# Altium PCB mb997.PcbDoc (part 3 of 4)
Units mil, origin at the board's own origin, x right, y up, seen from the top; angles counter-clockwise.
Board outline 2598.43 x 3818.9 mil, 2 copper layers (Top, Bottom), stack 62.402 mil thick; 189 components, 183 nets, 746 pads, 491 vias.
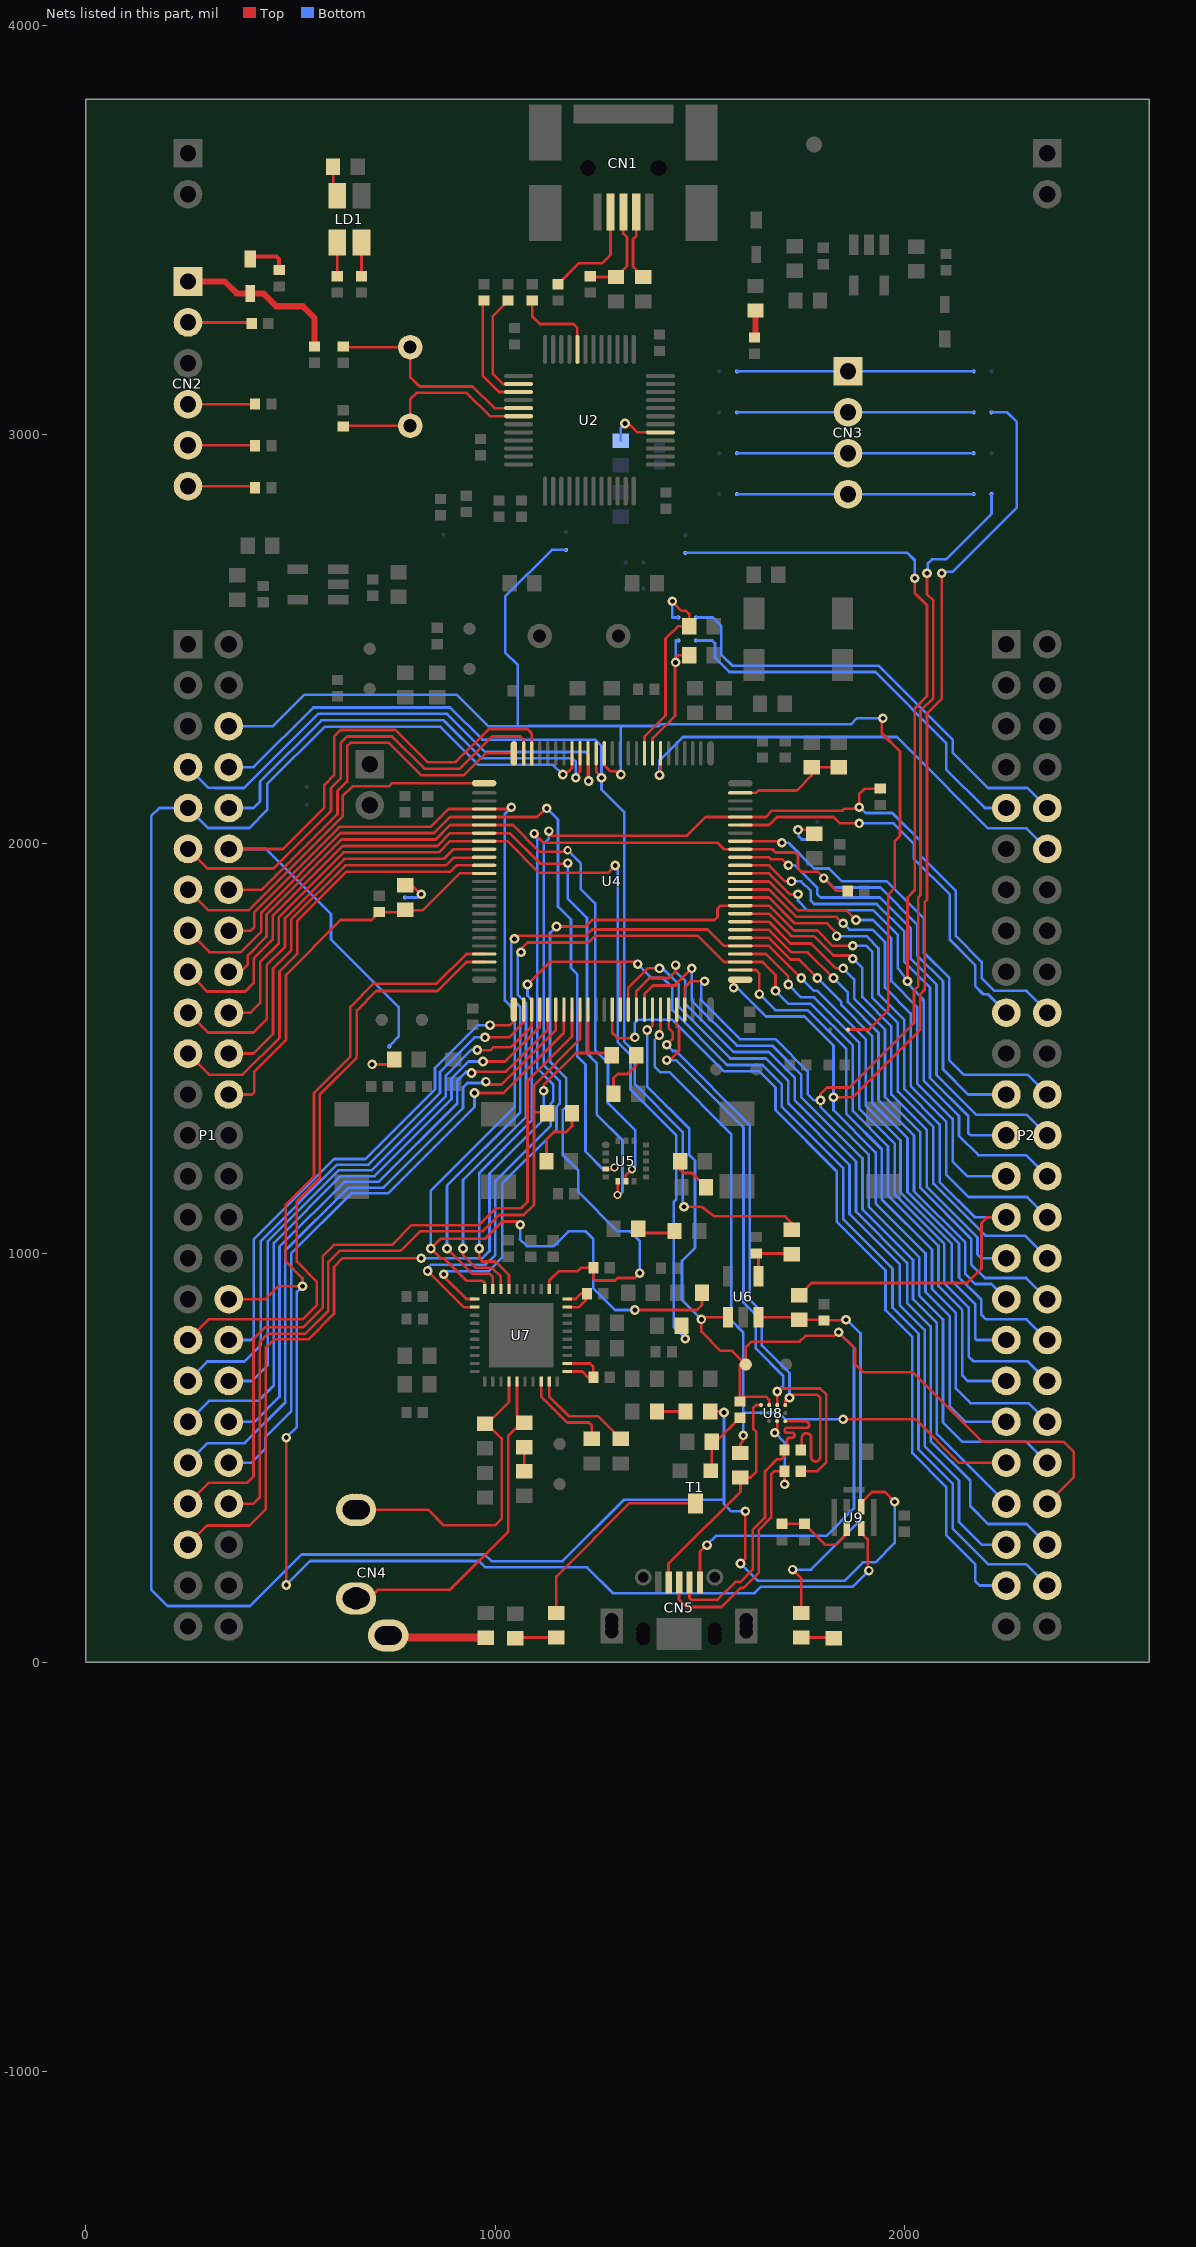
[diagram p3: the nets of this part, all layers, seen from the top]

## Via types
v1: diameter 23.62, hole 11.81, Top to Bottom, 484 vias
v2: diameter 19.68, hole 11.81, Top to Bottom, 7 vias

## Nets (pads, with @x,y where several pads share a name; then routed paths per layer and width w, separated by ;. In a path a pad name is that pad's centre, name@x,y a point inside that pad or via, vN(x,y) a via of type N, cw(c..) or ccw(c..) an arc to the next point about the centre after c; other vN are vias at no path point) (continued)
NetC54_2: C54.2 CN4.3 U7.14 | length 768.4
  Top w6.5: CN4.3@650.58,372.44 CN4.3@669.84,372.44 836.44,372.44 874.23,334.65 1000,334.65 1015.75,350.39 1015.75,547.24 982.91,580.08 C54.2@977.72,580.08 ; C54.2@975.2,582.6 C54.2@977.72,580.08 ; U7.14@1033.58,685.91 1033.58,635.94 C54.2@977.72,580.08
NetC55_1: C55.1 R62.2 | length 58.1
  Top w6.5: R62.2@1070.87,467.01 C55.1@1070.87,525.12
NetC55_2: C55.2 CN4.2 U7.15 | length 857.5
  Top w6.5: CN4.2@659.84,155.91 692.78,155.91 714.04,177.17 889.84,177.17 1031.5,318.83 1031.5,552.72 C55.2@1063.19,584.41 ; U7.15@1053.27,685.91 1053.27,602.64 1054.21,601.71 1054.21,583.59 C55.2@1063.19,584.41 ; C55.2@1070.87,585.12 1063.9,585.12 C55.2@1063.19,584.41
  Bottom w6.5: CN4.2@649.84,155.91 CN4.2@669.84,155.91
NetC56_2: C56.2 U7.18 | length 222.6
  Top w6.5: U7.18@1112.32,685.91 1112.32,648.93 1175.28,585.97 1228.35,585.97 1236.22,578.1 C56.2@1236.22,545.75
NetC57_2: C57.2 U7.19 | length 254.8
  Top w6.5: U7.19@1132.01,685.91 1132.01,648.93 1179.67,601.27 1251.56,601.27 C57.2@1307.09,545.75
NetCN1_2: CN1.2 R11.1 | length 171.9
  Top w6.5: CN1.2@1344.73,3543.35 1344.73,3485.44 1336.86,3477.57 1336.86,3410.46 R11.1@1362.17,3385.16
NetCN1_3: CN1.3 R9.1 R10.1 | length 236.6
  Top w6.5: R9.1@1232.24,3386.97 1234.06,3385.16 R10.1@1295.24,3385.16 1295.24,3385.32 1321.94,3412.02 1321.94,3482.43 1313.23,3491.14 CN1.3@1313.23,3543.35
NetCN1_4: CN1.4 R8.1 | length 262.3
  Top w6.5: R8.1@1153.5,3367.28 1205.12,3418.9 1261.73,3418.9 1281.73,3438.9 CN1.4@1281.73,3543.35
NetCN2_1: CN2.1 D2.1 R13.1 | length 415.4
  Top w15: CN2.1@249.21,3374.02 339.2,3374.02 368.33,3344.88 D2.1@401.57,3344.88 433.07,3344.88 464.57,3313.39 529.92,3313.39 558.21,3285.09 R13.1@558.21,3215.5
NetCN2_2: CN2.2 R12.1 | length 157
  Top w6.5: CN2.2@249.21,3274.02 402.83,3274.02 R12.1@405.2,3271.65
NetCN2_4: CN2.4 R15.1 | length 164.2
  Top w6.5: CN2.4@249.21,3074.02 412.28,3074.02 R15.1@413.07,3074.8
NetCN2_5: CN2.5 R16.1 | length 164.5
  Top w6.5: CN2.5@249.21,2974.02 411.5,2974.02 R16.1@413.07,2972.44
NetCN2_6: CN2.6 R17.1 | length 167.8
  Top w6.5: CN2.6@249.21,2874.02 413.07,2874.02 R17.1@413.07,2870.08
NetCN3_1: CN3.1 SB2.1 SB3.2 | length 578.7
  Bottom w6.5: SB2.1@1590.51,3154.37 CN3.1@1862.17,3154.37 SB3.2@2169.25,3154.37
NetCN3_2: CN3.2 SB4.1 SB5.2 | length 578.7
  Bottom w6.5: SB4.1@1590.51,3054.37 CN3.2@1862.17,3054.37 SB5.2@2169.25,3054.37
NetCN3_3: CN3.3 SB6.1 SB7.2 | length 578.7
  Bottom w6.5: SB6.1@1590.51,2954.37 CN3.3@1862.17,2954.37 SB7.2@2169.25,2954.37
NetCN3_4: CN3.4 SB8.1 SB9.2 | length 578.7
  Bottom w6.5: SB8.1@1590.51,2854.37 CN3.4@1862.17,2854.37 SB9.2@2169.25,2854.37
NetCN4_1: CN4.1 R65.1 | length 230.1
  Top w20: CN4.1@748.58,65.36 753.78,60.16 R65.1@976.54,60.16
NetCN5_2: CN5.2 R58.1 U8.D1 | length 768.6
  Top w6.5: CN5.2@1474.8,194.9 1474.8,157.31 1479.21,152.9 1543.71,152.9 1587.21,196.4 1599.21,196.4 1629.21,226.4 1629.21,323.34 1659.21,353.34 1659.21,466.4 1689.21,496.4 1699.21,496.4 1706.71,503.9 R58.1@1706.71,518.9 1712.71,524.9 1713.21,524.9 1713.21,542.9 cw(c1719.21,542.9) 1719.21,548.9 1725.21,548.9 ccw(c1725.21,554.9) 1731.21,554.9 ccw(c1725.21,554.9) 1725.21,560.9 1713.21,560.9 cw(c1713.21,566.9) 1707.21,566.9 cw(c1713.21,566.9) 1713.21,572.9 1761.21,572.9 ccw(c1761.21,578.9) 1767.21,578.9 ccw(c1756.89,578.9) 1756.89,589.22 U8.D1@1708.74,589.22
NetCN5_3: CN5.3 R60.1 U8.C1 | length 768.9
  Top w6.5: CN5.3@1449.21,194.9 1449.21,152.9 1467.21,134.9 1552.71,134.9 1599.21,181.4 1606.71,181.4 1644.21,218.9 1644.21,323.58 1674.21,353.58 1674.21,458.9 1681.71,466.4 R60.1@1706.71,466.4 1707.21,463.9 v1(1707.21,434.9) ; v1(1683.21,560.9) 1689.05,560.9 U8.C1@1689.05,589.22
  Bottom w6.5: v1(1683.21,560.9) 1707.21,536.9 v1(1707.21,434.9)
NetCN5_4: CN5.4 R59.1 U8.A3 | length 555.4
  Top w6.5: CN5.4@1423.62,194.9 1423.62,241.4 1520.29,338.07 1521.23,338.07 1599.21,416.05 R59.1@1599.21,451.4 1624.21,451.4 1637.49,464.68 1637.49,563.43 1630.77,570.15 1630.77,622.15 1637.21,628.59 U8.A3@1649.68,628.59
NetD2_2: D2.2 R2.1 | length 112.4
  Top w10: D2.2@401.57,3429.13 401.57,3434.9 465.21,3434.9 471.21,3428.9 471.21,3405.51 R2.1@468.82,3405.51 ; R2.1@465.21,3405.51 R2.1@468.82,3405.51 ; R2.1@472.44,3401.89 R2.1@468.82,3405.51
NetLD1_2: LD1.2 R4.2 | length 82.4
  Top w6.5: R4.2@673.19,3386.97 LD1.2@673.19,3469.33
NetLD1_3: LD1.3 R3.2 | length 82.4
  Top w6.5: R3.2@614.13,3386.97 LD1.3@614.13,3469.33
NetLD1_4: LD1.4 R1.1 | length 91.2
  Top w6.5: R1.1@603.82,3654.37 603.82,3587.28 607.09,3590.55 612.15,3595.61 613.82,3583.82 LD1.4@614.13,3583.5
NetLD2_1: LD2.1 R14.1 | length 66.8
  Top w13.78: R14.1@1633.82,3237.36 1636.12,3239.67 LD2.1@1636.12,3303.17
NetLD3_1: LD3.1 R36.1 | length 131.2
  Top w6.5: LD3.1@1289.21,1388.9 1289.21,1427.41 1299.21,1437.41 1322.82,1437.41 1344.95,1459.54 R36.1@1344.95,1483.15
NetLD4_1: LD4.1 R40.1 | length 161
  Top w6.5: LD4.1@1125.21,1223.9 1125.21,1277.75 1143.21,1295.75 1173.29,1295.75 1187.55,1310.01 R40.1@1187.55,1341.49
NetLD5_1: LD5.1 R41.1 | length 101.4
  Top w6.5: LD5.1@1452.21,1223.9 1452.21,1202.9 1459.71,1195.4 1480.71,1195.4 R41.1@1515.21,1160.9
NetLD6_1: LD6.1 R42.1 | length 104.1
  Top w6.5: LD6.1@1349.21,1058.9 1359.21,1048.9 1431.21,1048.9 1431.21,1058.14 1433.97,1058.14 R42.1@1438.21,1053.9
NetLD7_1: LD7.1 R66.1 | length 100.7
  Top w6.5: R66.1@1049.21,58.9 1050.87,60.55 LD7.1@1149.21,60.55
NetLD7_2: LD7.2 T1.3 | length 503.9
  Top w6.5: LD7.2@1149.21,120.55 1149.21,209.9 1328.21,388.9 1488.21,388.9 T1.3@1489.21,387.9
NetLD8_1: LD8.1 R67.1 | length 80.3
  Top w6.5: LD8.1@1748.03,60.55 1825.98,60.55 R67.1@1827.64,58.9
NetLD8_2: LD8.2 R50.2 R51.2 U6.3 | length 1054.3
  Top w6.5: U6.3@1643.54,842.9 1733.26,842.9 1735.98,840.18 R50.2@1743.21,836.9 1801.14,836.9 R51.2@1802.18,835.86 ; v1(1726.71,226.4) 1748.03,205.08 LD8.2@1748.03,120.55 ; R51.2@1803.21,834.9 R51.2@1802.22,835.83 ; v1(1857.21,836.9) 1856.18,835.86 R51.2@1802.18,835.86 ; R51.2@1802.18,835.86 R51.2@1802.22,835.83
  Bottom w6.5: v1(1726.71,226.4) 1771.71,226.4 1892.75,347.44 1892.75,803.9 1859.75,836.9 v1(1857.21,836.9)
NetR5_2: R5.2 U2.3 | length 289.2
  Top w6.5: R5.2@972.4,3327.28 972.4,3318.9 969.21,3315.71 969.21,3143.9 1009.21,3103.9 U2.3@1057.11,3103.9
NetR6_2: R6.2 U2.2 | length 267.6
  Top w6.5: R6.2@1031.46,3327.28 1031.46,3326.46 993.9,3288.9 993.9,3148.9 1019.21,3123.58 U2.2@1057.11,3123.58
NetR7_2: R7.2 U2.44 | length 212.5
  Top w6.5: R7.2@1090.51,3327.28 1090.51,3288.9 1109.21,3270.2 1190.81,3270.2 1200.81,3260.2 U2.44@1200.81,3208.23
NetR27_1: R27.1 R28.1 U4.99 | length 278.2
  Top w6.5: U4.99@1598.96,2124.48 1637.62,2124.48 1643.45,2130.31 1737.21,2130.31 1773.21,2166.31 R27.1@1773.21,2186.9 R28.1@1839.21,2186.9
NetR30_1: R30.1 SB18.2 | length 110.5
  Top w6.5: v1(1739.93,2034.05) 1771.41,2034.05 1771.41,2032.57 R30.1@1779.28,2024.7
  Bottom w6.5: v1(1739.93,2034.05) 1741.71,2034.04 1741.71,2017.93 1749.21,2010.43 SB18.2@1787.15,2010.43
NetR32_2: R32.2 SB19.2 | length 91.7
  Top w6.5: R32.2@779.79,1898.78 R32.2@780.5,1899.43 ; R32.2@780.53,1899.46 795.53,1899.46 818.35,1876.65 v1(819.14,1876.65)
  Bottom w6.5: SB19.2@779.79,1868.77 v1@811.27,1868.77 ; v1@811.27,1868.78 v1(819.14,1876.65)
NetR35_1: R35.1 SB20.2 | length 114.6
  Top w6.5: v1(699.21,1460.9) 744.83,1460.9 759.21,1475.28 R35.1@753.21,1472.9
  Bottom w6.5: v1(699.21,1460.9) 740.83,1460.9 SB20.2@741.21,1461.28
NetR45_2: R45.2 R46.1 U6.4 | length 143
  Top w6.5: R45.2@1637.62,998.82 R45.2@1643.54,998.82 ; U6.4@1643.54,942.9 R45.2@1643.54,998.82 ; R46.1@1724.19,996.69 1716.18,997.6 1715.97,997.6 1714.75,998.82 R45.2@1643.54,998.82
NetR47_2: R47.2 U7.29 U7.30 | length 121.9
  Top w6.5: U7.29@1176.1,867.8 1204.77,867.8 1220.51,883.54 R47.2@1220.51,900.84 ; U7.30@1176.1,887.48 1196.63,887.48 1210.15,901 1212.64,901 R47.2@1220.51,900.84 ; R47.2@1224.12,900.77 R47.2@1220.51,900.84
NetR53_2: R53.2 U7.21 U7.22 | length 162.2
  Top w6.5: U7.21@1176.1,710.32 1212.88,710.32 1226.99,696.21 1236.25,696.21 R53.2@1239.86,696.15 1239.86,721.4 1231.26,730 U7.22@1176.1,730
NetR54_2: R54.2 R55.2 | length 70
  Top w6.5: R54.2@1395.2,612.6 R55.2@1465.2,612.6
NetR56_1: R56.1 R57.2 T1.1 | length 165.3
  Top w6.5: T1.1@1526.71,467.9 1529.21,470.4 R57.2@1529.21,538.9 1539.72,538.9 R56.1@1598.27,597.45
NetR63_2: R63.2 R64.1 U9.2 | length 227.6
  Top w6.5: R63.2@1700.58,338.39 1732.06,338.39 ; 1732.06,338.5 1732.06,338.39 ; 1732.08,338.52 R64.1@1755.67,338.62 ; U9.2@1859,326.76 1859,313.68 1832.23,286.92 1807.14,286.92 R64.1@1755.67,338.39 1732.06,338.39
NetR68_1: R68.1 U2.29 | length 141.7
  Top w6.5: v1(1317.21,3026.9) 1325.79,3026.9 1347.21,3005.47 U2.29@1403.57,3005.47
  Bottom w6.5: R68.1@1307.08,2984.84 1307.08,3014.65 1306.83,3014.9 1306.83,3016.52 v1(1317.21,3026.9)
NRST: P1.6 SB1.1 SB11.2 U4.14 | length 3264.6
  Top w6.5: U4.14@1266.28,2220.94 1266.28,2192.91 1282.03,2177.17 1294.43,2177.17 1300.52,2171.08 v1(1307.09,2169.29) ; SB1.1@1861.93,1546.11 1913.07,1546.11 1913.24,1545.94 1960.63,1593.33 1960.63,1876.65 1976.03,1892.05 1976.03,2005.72 1989.21,2018.9 1989.21,2225.49 1944.55,2270.15 1944.55,2301.66 v1@1952.42,2301.66 ; v1(1947.21,2306.9) v1@1952.42,2301.69
  Bottom w6.5: P1.6@349.21,2287.4 457.12,2287.4 534.31,2364.59 905.71,2364.59 982.9,2287.4 1055.24,2287.4 ; SB11.2@1173.21,2718.28 1138.21,2718.28 1024.49,2604.56 1024.49,2467.76 1055.24,2437.01 1055.24,2287.4 ; v1(1307.09,2169.29) 1307.09,2287.88 ; v1(1947.21,2306.9) 1884.21,2306.9 1869.21,2291.9 1403.23,2291.9 1399.21,2287.88 1307.09,2287.88 ; 1055.24,2287.4 1082.19,2287.88 1307.09,2287.88
OSC_IN: C6.2 U2.5 X1.2 | length 554.9
  Top w6.5: C6.2@628.41,3215.5 C6.2@627.24,3213.56 ; U2.5@1057.11,3064.53 997.82,3064.53 944.85,3117.5 815.61,3117.5 792.21,3140.9 X1.2@792.21,3213.56 C6.2@627.24,3213.56 ; C6.2@627.24,3213.56 623.23,3206.9 623.23,3213.56 C6.2@627.24,3213.56
OSC_OUT: C9.2 U2.6 X1.1 | length 524.5
  Top w6.5: C9.2@628.41,3019.5 630.35,3021.43 X1.1@792.21,3021.43 792.21,3086.3 807.81,3101.9 930.16,3101.9 987.21,3044.84 U2.6@1057.11,3044.84
PA0: P1.12 SB20.1 U4.23 | length 1785.3
  Top w6.5: P1.12@349.21,1987.4 481.72,1987.4 582.47,2088.15 582.47,2144.23 606.37,2168.12 606.37,2262.56 621.82,2278.02 756.18,2278.02 834.88,2199.32 903.32,2199.32 984.41,2280.41 1078.85,2280.41 1089.11,2270.15 U4.23@1089.11,2220.94
  Bottom w6.5: P1.12@349.21,1987.4 439.78,1987.4 598.78,1828.4 598.78,1766.47 764.05,1601.2 764.05,1528.58 744.11,1508.64 741.21,1505.74 SB20.1@741.21,1504.58
PA1: P1.11 U4.24 | length 1159
  Top w6.5: P1.11@249.21,1987.4 297.01,1939.61 457.92,1939.61 598.78,2080.47 598.78,2136.36 622.39,2159.97 622.39,2246.54 638.13,2262.28 748.31,2262.28 827.01,2183.58 913.58,2183.58 992.28,2262.28 1061.56,2262.28 1069.43,2254.41 U4.24@1069.43,2220.94
PA2: P1.14 U4.25 | length 983.4
  Top w6.5: P1.14@349.21,1887.4 429.38,1887.4 614.52,2072.54 614.52,2128.49 638.13,2152.1 638.13,2238.67 646,2246.54 740.44,2246.54 819.14,2167.84 923.44,2167.84 976.54,2220.94 U4.25@1045.81,2220.94
PA3: P1.13 U4.26 | length 902.2
  Top w6.5: P1.13@249.21,1887.4 299.32,1837.3 397.61,1837.3 627.21,2066.9 627.21,2116.24 651.21,2140.24 740.44,2140.24 748.31,2148.11 U4.26@972.97,2148.11
PA4: P1.16 R48.2 U4.29 U7.40 | length 3134.9
  Top w6.5: P1.16@349.21,1787.4 402.03,1787.4 411.37,1796.74 411.37,1833.06 620.23,2041.92 842.75,2041.92 885.95,2085.11 U4.29@972.97,2085.11 1038.15,2085.11 1039.5,2086.47 v1(1039.5,2089.14) ; U7.40@974.53,911.89 974.53,926.93 969.21,932.25 929.32,932.25 874.23,987.34 866.36,987.34 v1(842.75,1010.95) 866.7,1034.9 975.21,1034.9 1017.21,1076.9 1053.21,1076.9 v1(1061.21,1068.9) ; v1(1341.21,860.9) 1493.2,860.9 1505.2,872.9 R48.2@1505.2,902.6
  Bottom w6.5: v1(842.75,1010.95) 842.75,1152.49 1047.62,1357.36 1047.62,1592.9 1023.62,1616.9 1023.62,2073.4 1039.36,2089.14 v1(1039.5,2089.14) ; v1(1061.21,1068.9) 1061.21,1033.9 1060.71,1033.4 1077.21,1016.9 1143.21,1016.9 1179.21,1052.9 1221.21,1052.9 1239.21,1034.9 1239.21,914.9 1293.21,860.9 v1(1341.21,860.9)
PA5: P1.15 U4.30 U5.4 | length 2064.9
  Top w6.5: P1.15@249.21,1787.4 301.32,1735.29 378.42,1735.29 428.62,1785.49 428.62,1832.3 622.49,2026.18 850.72,2026.18 889.97,2065.43 1102.36,2065.43 1123.55,2086.61 v1(1125.98,2086.61) ; U5.4@1270,1205.12 1270.39,1204.72 1287.4,1204.72 v2(1291.34,1208.66)
  Bottom w6.5: v1(1125.98,2086.61) 1153.54,2059.06 1153.54,1846.46 1185.04,1814.96 1185.04,1696.85 1200.79,1681.1 1200.79,1480.32 1220.47,1460.63 1220.47,1248.03 1263.78,1204.72 1291.34,1204.72 v2(1291.34,1208.66)
PA6: P1.18 U4.31 U5.7 | length 1939.4
  Top w6.5: P1.18@349.21,1687.4 378.42,1687.4 395.48,1704.46 395.48,1727.12 441.24,1772.87 441.24,1826.92 624.75,2010.44 854.67,2010.44 889.97,2045.74 U4.31@972.97,2045.74 1043.31,2045.74 1108.74,1980.32 1177.17,1980.32 v2(1177.17,1984.25) ; U5.7@1319.21,1175.59 1318.9,1175.91 1318.9,1188.98 v2(1334.65,1204.72)
  Bottom w6.5: v2(1177.17,1984.25) 1208.66,1952.76 1208.66,1889.76 1244.09,1854.33 1244.09,1496.06 1275.59,1464.57 1275.59,1366.14 1342.52,1299.21 1342.52,1212.6 v2(1334.65,1204.72)
PA7: P1.17 U4.32 U5.6 | length 2117.3
  Top w6.5: P1.17@249.21,1687.4 296.07,1638.9 389.21,1638.9 409.9,1659.59 409.9,1719.25 456.21,1765.56 456.21,1823.9 627.01,1994.7 858.61,1994.7 889.97,2026.06 1035.43,2026.06 1110.24,1951.26 1173.23,1951.26 1174.73,1952.76 v1(1177.17,1952.76) ; v2(1299.21,1141.73) 1299.21,1175.28 U5.6@1299.53,1175.59
  Bottom w6.5: v1(1177.17,1952.76) 1177.17,1866.14 1224.41,1818.9 1224.41,1488.19 1248.03,1464.57 1248.03,1338.58 1311.02,1275.59 1311.02,1149.61 1303.15,1141.73 v2(1299.21,1141.73)
PA8: P2.43 U4.67 | length 1858.3
  Top w6.5: U4.67@1364.7,1594.96 1364.7,1632.68 1385.78,1653.76 1440.87,1653.76 1440.87,1656.29 v1(1480.22,1695.64)
  Bottom w6.5: v1(1480.22,1695.64) 1480.22,1616.94 1590.4,1506.76 1676.97,1506.76 1747.8,1435.93 1747.8,1380.84 1897.33,1231.31 1897.33,1106.9 2020.88,983.35 2020.88,887.4 2079.21,829.07 2079.21,557.4 P2.43@2249.21,387.4
PA9: C49.1 CN5.1 P2.44 R56.2 U4.68 U6.1 U8.B3 | length 3372
  Top w6.5: v1(1371.21,1544.9) 1373.72,1544.9 1384.39,1555.57 U4.68@1384.39,1594.96 ; CN5.1@1500.39,194.9 1500.39,270.5 1515.99,286.1 v1(1517.61,286.1) ; U6.1@1568.74,842.9 1511.63,842.9 1507.05,838.31 v1(1503.83,837.81) 1503.83,808.09 1551.05,760.87 1578.99,760.87 C49.1@1612.23,727.63 ; R56.2@1598.27,637.45 R56.2@1598.27,648.93 ; U8.B3@1669.37,628.59 1669.37,641.06 1661.5,648.93 R56.2@1598.27,648.93 ; P2.44@2349.21,387.4 2413.99,452.18 2413.99,514.12 2389.21,538.9 2189.21,538.9 2019.21,708.9 1899.21,708.9 1879.21,728.9 1879.21,766.33 v1(1839.21,806.33) 1836.34,806.33 1827.78,797.77 1758.34,797.77 1743.78,783.21 1625.75,783.21 1612.23,769.7 C49.1@1612.23,727.63 ; R56.2@1598.27,648.93 1598.27,727.63 C49.1@1612.23,727.63
  Bottom w6.5: v1(1371.21,1544.9) 1371.21,1407.04 1474.13,1304.12 1474.13,1239.82 1488.09,1225.85 1488.09,1012.38 1456.61,980.9 1456.61,885.03 v1(1503.83,837.81) ; v1(1517.61,286.1) 1517.61,287.61 1539.06,309.05 1809.37,309.05 1876.71,376.4 1876.71,768.83 v1(1839.21,806.33)
PA10: P2.41 R59.2 U4.69 | length 1889
  Top w6.5: v1(1401.21,1532.9) 1404.07,1535.76 U4.69@1404.07,1594.96 ; R59.2@1599.21,511.4 1599.21,534.47 1606.14,541.4 v1(1606.14,554.49) ; v1(1850.11,593.84) 2027,593.84 2133.43,487.4 P2.41@2249.21,487.4
  Bottom w6.5: v1(1401.21,1532.9) 1401.21,1532.52 1389.59,1520.9 1389.59,1456.02 1404.21,1441.4 1426.71,1441.4 1576.71,1291.4 1576.71,835.76 1606.14,806.33 1606.14,609.58 ; v1(1606.14,554.49) 1606.14,609.58 ; v1(1850.11,593.84) 1708.45,593.84 1692.71,609.58 1606.14,609.58
PA11: R58.2 U4.70 U8.D3 | length 1486.8
  Top w6.5: v1(1419.21,1508.9) 1434.21,1523.9 1434.21,1538.9 1423.76,1549.35 U4.70@1423.76,1594.96 ; U8.D3@1708.74,628.59 1708.74,638.9 1716.24,646.4 v1(1719.21,646.4) 1726.71,653.9 1786.71,653.9 1794.21,646.4 1794.21,501.9 cw(c1782.96,501.9) 1771.71,501.9 1771.71,548.71 1771.57,551.61 ccw(c1760.71,548.65) 1749.46,548.65 1749.21,518.9 R58.2@1746.71,518.9
  Bottom w6.5: v1(1419.21,1508.9) 1419.21,1508.62 1434.21,1493.62 1441.42,1493.62 1621.71,1313.33 1621.71,886.4 1651.71,856.4 1651.71,773.9 1719.21,706.4 v1(1719.21,646.4)
PA12: R60.2 U4.71 U8.C3 | length 1489.3
  Top w6.5: v1(1419.21,1471.4) 1426.71,1471.4 1449.21,1493.9 1449.21,1548.13 1443.44,1553.9 U4.71@1443.44,1594.96 ; U8.C3@1689.05,628.59 1689.05,661.24 v1(1689.21,661.4) 1689.21,661.56 1696.55,668.9 1794.21,668.9 1809.21,653.9 1809.21,488.9 1786.71,466.4 R60.2@1746.71,466.4
  Bottom w6.5: v1(1419.21,1471.4) 1441.71,1471.4 1606.71,1306.4 1606.71,878.9 1636.71,848.9 1636.71,766.4 1704.21,698.9 1704.21,676.4 v1(1689.21,661.4)
PA13: P2.42 SB9.1 U4.72 | length 3510.6
  Top w6.5: U4.72@1463.13,1594.96 1463.13,1648.42 1478.87,1664.16 v1(1511.7,1664.16) ; v1(1795.02,1372.97) 1795.02,1388.71 1810.76,1404.45 1865.85,1404.45 2023.25,1561.85 2023.25,1640.55 2033.41,1650.7 2033.41,1868.9 2039.41,1874.9 2039.41,2325.49 2070.47,2356.55 2070.47,2594.47 2055.21,2609.73 v1(2055.21,2660.9)
  Bottom w6.5: v1(1511.7,1664.16) 1503.83,1656.29 1503.83,1616.94 1598.27,1522.5 1684.84,1522.5 1763.54,1443.8 1763.54,1388.71 1779.28,1372.97 v1(1795.02,1372.97) 1795.02,1357.23 1913.07,1239.18 1913.07,1112.9 2036.1,989.87 2036.1,895.79 2094.08,837.81 2094.08,585.97 2141.3,538.75 2297.87,538.75 P2.42@2349.21,487.4 ; v1(2055.21,2660.9) 2056.98,2660.9 2056.98,2684.9 2067.21,2695.13 2101.29,2695.13 2212.56,2806.4 SB9.1@2212.56,2854.37
PA14: P2.39 SB5.1 U4.76 | length 3439.7
  Top w6.5: v1(1582.53,1648.42) 1582.53,1664.16 1598.96,1664.16 U4.76@1598.96,1667.79 ; v1(1826.5,1380.84) 1873.72,1380.84 2038.99,1546.11 2038.99,1632.68 2049.65,1643.33 2049.65,1857.33 2055.21,1862.9 2055.21,2318.9 2091.21,2354.9 v1(2091.21,2660.9)
  Bottom w6.5: v1(1582.53,1648.42) 1591.24,1648.42 1661.65,1578.01 1755.25,1578.01 1826.5,1506.76 v1(1826.5,1380.84) 1826.5,1349.11 1929.53,1246.08 1929.53,1120.95 2051.27,999.21 2051.27,904.95 2110.54,845.68 2110.54,626.03 2149.17,587.4 P2.39@2249.21,587.4 ; v1(2091.21,2660.9) 2094.84,2664.53 2117.69,2664.53 2274.21,2821.05 2274.21,3031.4 2251.24,3054.37 SB5.1@2212.56,3054.37
PA15: P2.40 U4.77 | length 1566.8
  Top w6.5: U4.77@1598.96,1691.41 1637.62,1691.41 1645.49,1683.54 v1(1645.49,1632.68)
  Bottom w6.5: v1(1645.49,1632.68) 1684.84,1593.33 1763.54,1593.33 1857.98,1498.89 1857.98,1340.13 1944.55,1253.56 1944.55,1130.9 2067.21,1008.24 2067.21,911.9 2125.56,853.55 2125.56,668.9 2161.27,633.19 2303.43,633.19 P2.40@2349.21,587.4
PB0: P1.22 U4.35 | length 960.3
  Top w6.5: P1.22@349.21,1487.4 409.12,1487.4 457.12,1535.4 457.12,1695.64 501.21,1739.73 501.21,1814.9 633.79,1947.48 879.53,1947.48 897.84,1965.79 951.71,1965.79 952.93,1967 U4.35@972.97,1967
PB1: P1.21 U4.36 | length 1099
  Top w6.5: P1.21@249.21,1487.4 300.69,1435.93 382.86,1435.93 472.86,1525.93 472.86,1687.77 516.21,1731.12 516.21,1811.9 635.81,1931.5 889.89,1931.5 905.71,1947.32 U4.36@972.97,1947.32
PB2: P1.24 R32.1 R34.2 U4.37 | length 974
  Top w6.5: P1.24@349.21,1387.4 405.21,1387.4 411.21,1393.4 411.21,1443.51 488.6,1520.9 488.6,1679.9 622.39,1813.69 697.48,1813.69 R34.2@716.83,1833.04 779.79,1833.04 R32.1@779.79,1837.3 ; R32.1@779.79,1838.78 R32.1@779.79,1837.3 ; U4.37@972.97,1927.63 913.02,1927.63 822.68,1837.3 R32.1@779.79,1837.3
PB3: P2.28 SB12.2 U4.89 | length 2893.3
  Top w6.5: U4.89@1598.96,1927.63 1669.1,1927.63 1720.09,1876.65 v1(1739.93,1876.65) ; v1(2007.51,1664.16) 2007.51,1868.9 2025.21,1886.6 2025.21,2330.9 2055.21,2360.9 2055.21,2582.9 2025.21,2612.9 v1(2025.21,2648.9)
  Bottom w6.5: SB12.2@1464.48,2710.86 2007.21,2710.87 2025.21,2692.87 v1(2025.21,2648.9) ; v1(1739.93,1876.65) 1739.93,1860.91 1763.54,1837.3 1923.9,1837.3 1983.9,1777.3 1983.9,1695.64 1987.84,1691.7 v1(2007.51,1664.16) 2007.51,1658.28 2045.28,1620.51 2045.28,1618.52 2046.86,1616.94 2046.86,1421.25 2133.43,1334.68 2133.43,1286.4 2180.65,1239.18 2297.44,1239.18 P2.28@2349.21,1187.4
PB4: P2.25 U4.90 | length 1134.4
  Top w6.5: U4.90@1598.96,1947.32 1669.1,1947.32 1708.37,1908.05 1708.45,1908.13 v1(1724.19,1908.13)
  Bottom w6.5: v1(1724.19,1908.13) 1747.8,1908.13 1771.41,1884.52 1771.41,1860.91 1779.28,1853.04 1932.14,1853.04 1999.64,1785.54 1999.64,1711.38 2062.6,1648.42 2062.6,1428.01 2155.92,1334.69 2155.92,1293.19 2161.71,1287.4 P2.25@2249.21,1287.4
PB5: P2.26 U4.91 | length 1214.4
  Top w6.5: U4.91@1598.96,1967 1669.1,1967 1673.56,1962.54 1701.26,1962.54 v1(1716.32,1947.48)
  Bottom w6.5: v1(1716.32,1947.48) 1732.06,1947.48 1787.15,1892.39 1787.15,1876.65 1795.02,1868.78 1940.38,1868.78 2015.38,1793.78 2015.38,1719.25 2078.34,1656.29 2078.34,1434.77 2175.2,1337.91 2298.7,1337.91 P2.26@2349.21,1287.4
PB6: P2.23 R33.2 U4.92 U7.2 | length 3124
  Top w6.5: v1(834.88,955.86) 922.94,867.8 U7.2@950.12,867.8 ; v1(1095.21,2024.9) 1117.54,2002.57 1543,2002.57 1558.88,1986.69 U4.92@1598.96,1986.69 1676.97,1986.69 1684.77,1978.89 1732.06,1978.89 1739.9,1971.05 1739.9,1939.64 1747.8,1931.74 1787.15,1931.74 v1(1802.89,1916) 1833.63,1885.26 1850.85,1885.26 R33.2@1861.59,1884.52
  Bottom w6.5: v1(834.88,955.86) 834.88,963.73 842.75,971.6 976.54,971.6 1000.37,995.43 1000.37,1176.28 1135.83,1311.74 1135.83,1365.1 1141.81,1371.08 1141.81,1412.32 1102.46,1451.67 1102.46,2012.9 1095.21,2020.15 v1(1095.21,2024.9) ; v1(1802.89,1916) 1803.55,1916 1826.5,1893.04 1941.12,1893.04 2031.12,1803.04 2031.12,1727.12 2094.08,1664.16 2094.08,1449.03 2155.71,1387.4 P2.23@2249.21,1387.4
PB7: P2.24 U4.93 | length 1173.2
  Top w6.5: U4.93@1598.96,2006.37 1690.74,2006.37 1694.54,2002.57 v1(1700.58,2002.57)
  Bottom w6.5: v1(1700.58,2002.57) 1716.32,2002.57 1779.28,1939.61 1815.52,1939.61 1847,1908.13 1956.86,1908.13 2046.86,1818.13 2046.86,1734.99 2109.82,1672.03 2109.82,1470.79 2144.68,1435.93 2300.69,1435.93 P2.24@2349.21,1387.4
PB8: P2.19 U4.95 | length 972.6
  Top w6.5: U4.95@1598.96,2045.74 1669.1,2045.74 1688.89,2065.53 1826.5,2065.53 1842.24,2049.79 v1(1889.46,2049.79)
  Bottom w6.5: v1(1889.46,2049.79) 1973.32,2049.79 2023.25,1999.86 2023.25,1963.22 2110.79,1875.68 2110.79,1765.5 2172.78,1703.51 2172.78,1652.15 2192.58,1632.35 2204.26,1632.35 P2.19@2249.21,1587.4
PB9: P2.20 R29.2 U4.96 U7.1 | length 3054
  Top w6.5: v1(874.23,947.99) 875.46,946.76 875.46,941.34 929.32,887.48 U7.1@950.12,887.48 ; v1(1131.21,2030.9) 1127.47,2030.9 1128.41,2029.28 1133.94,2019.71 1468.68,2019.71 1514.4,2065.43 1661.23,2065.43 1676.85,2081.05 1849,2081.05 1853.87,2085.92 1878.37,2085.92 1881.59,2089.14 v1(1889.46,2089.14) 1889.46,2121.29 1901.21,2133.04 1903.07,2134.9 R29.2@1941.21,2134.9
  Bottom w6.5: v1(874.23,947.99) 882.1,955.86 984.41,955.86 1017.09,988.53 1017.09,1169.43 1149.68,1302.02 1149.68,1357.23 1157.55,1365.1 1157.55,1420.19 1118.2,1459.54 1118.2,1999.89 1131.21,2012.9 v1(1131.21,2030.9) ; v1(1889.46,2089.14) 1891.49,2089.14 1905.2,2075.42 1970.19,2075.42 2038.99,2006.62 2038.99,1971.09 2125.56,1884.52 2125.56,1774.34 2188.52,1711.38 2188.52,1672.03 2220,1640.55 2298.7,1640.55 2349.21,1590.04 P2.20@2349.21,1587.4
PB10: P1.34 U4.47 U9.3 | length 3693.9
  Top w6.5: P1.34@349.21,887.4 439.21,887.4 470.71,918.9 v1(529.21,918.9) 529.21,938.05 488.37,978.9 488.37,1118.05 557.21,1186.9 557.21,1390.9 646,1479.69 646,1601.2 702.93,1658.12 856.66,1658.12 929.32,1730.78 U4.47@972.97,1730.78 ; v1(489.21,188.9) v1(489.21,548.9) ; U9.3@1890.31,330.89 U9.3@1894.43,326.76 ; U9.3@1894.43,315.94 1910.28,300.09 1910.28,226.74 v1(1913.07,223.95)
  Bottom w6.5: v1(489.21,188.9) 547.87,247.56 960.8,247.56 976.54,231.82 1224.21,231.82 1287.21,168.82 1633.51,168.82 1649.29,184.6 1873.72,184.6 v1(1913.07,223.95) ; v1(489.21,548.9) 515.21,574.9 515.21,904.9 v1(529.21,918.9)
PB11: P1.35 U4.48 | length 1511.5
  Top w6.5: P1.35@249.21,787.4 299.67,837.86 529.21,837.86 564.21,872.86 564.21,928.9 515.21,978.9 515.21,1126.9 571.21,1182.9 571.21,1386.9 661.74,1477.43 661.74,1593.19 708.96,1640.41 858.63,1640.41 929.32,1711.1 U4.48@972.97,1711.1
PB12: P1.36 U4.51 | length 1219.1
  Top w6.5: v1(987.21,1556.9) 1036.22,1556.9 1045.81,1566.48 U4.51@1045.81,1594.96
  Bottom w6.5: P1.36@349.21,787.4 403.21,787.4 410.21,794.4 410.21,1033.9 606.21,1229.9 683.21,1229.9 852.71,1399.4 852.71,1452.4 931.76,1531.44 932.29,1531.44 957.75,1556.9 v1(987.21,1556.9)
PB13: P1.37 U4.52 | length 1394.8
  Top w6.5: v1(975.21,1526.9) 1033.43,1526.9 1069.43,1562.9 U4.52@1069.43,1594.96
  Bottom w6.5: P1.37@249.21,687.4 296.71,734.9 387.21,734.9 427.21,774.9 427.21,1029.9 613.21,1215.9 690.21,1215.9 865.21,1390.9 865.21,1442.9 949.21,1526.9 v1(975.21,1526.9)
PB14: P1.38 U4.53 | length 1347.1
  Top w6.5: v1(956.21,1495.9) 989.24,1495.9 996.24,1502.9 1038.03,1502.9 1089.11,1553.98 U4.53@1089.11,1594.96
  Bottom w6.5: P1.38@349.21,687.4 405.21,687.4 444.46,726.65 444.46,1029.15 617.21,1201.9 697.21,1201.9 879.21,1383.9 879.21,1433.9 942.21,1496.9 955.21,1496.9 v1(956.21,1495.9)
PB15: P1.39 U4.54 | length 1535
  Top w6.5: v1(970.21,1467.9) 1024.25,1467.9 1108.8,1552.44 U4.54@1108.8,1594.96
  Bottom w6.5: P1.39@249.21,587.4 300.42,638.61 420.93,638.61 459.21,676.9 459.21,1024.96 622.15,1187.9 705.15,1187.9 879.68,1362.43 893.21,1375.96 893.21,1425.9 935.21,1467.9 v1(970.21,1467.9)
PC0: P1.8 R46.2 U4.15 | length 2579.9
  Top w6.5: U4.15@1246.59,2220.94 1246.59,2177.17 1259.84,2163.92 v1(1259.84,2161.42) ; v1(1461.21,1112.9) 1503.83,1112.9 1535.31,1089.65 1708.45,1089.65 1724.19,1073.91 R46.2@1724.19,1056.69
  Bottom w6.5: P1.8@349.21,2187.4 409.9,2187.4 555.61,2333.11 889.97,2333.11 968.69,2254.39 1244.12,2254.39 1259.84,2238.67 v1(1259.84,2161.42) 1259.84,2132.9 1314.95,2077.79 1314.95,1517.16 1341.21,1490.9 1341.21,1412.9 1458.2,1295.91 1458.2,1118.9 1462.7,1114.39 v1(1461.21,1112.9)
PC1: P1.7 U4.16 | length 1248
  Top w6.5: U4.16@1226.91,2220.94 1226.91,2154.98 v1(1228.35,2153.54)
  Bottom w6.5: P1.7@249.21,2187.4 299.72,2136.89 314.93,2136.89 315.46,2136.36 386.29,2136.36 567.3,2317.37 882.1,2317.37 975.06,2224.41 1220.47,2224.41 1228.35,2216.54 v1(1228.35,2153.54)
PC2: P1.10 U4.17 | length 1109.7
  Top w6.5: v1(1196.85,2161.42) 1196.85,2166.79 1207.22,2177.17 U4.17@1207.22,2220.94
  Bottom w6.5: P1.10@349.21,2087.4 409.45,2087.4 425.2,2103.15 425.2,2151.65 575.17,2301.63 874.23,2301.63 967.2,2208.66 1188.98,2208.66 1196.85,2200.79 v1(1196.85,2161.42)
PC3: P1.9 R55.1 U4.18 U9.4 | length 5802.3
  Top w6.5: v1(1165.35,2169.29) 1179.67,2177.17 1187.54,2185.04 U4.18@1187.54,2220.94 ; R55.1@1525.2,612.6 1556.69,612.6 v1(1559.06,610.24) ; v1(1599.21,241.4) 1611.22,253.41 v1(1611.22,368.9) ; U9.4@1892.75,387.9 1920.69,415.84 1952.37,415.84 v1(1976.03,392.17)
  Bottom w6.5: v1(1165.35,2169.29) 1141.73,2192.91 959.34,2192.91 866.36,2285.89 583.04,2285.89 442.82,2145.67 442.82,2082.23 399.22,2038.63 297.98,2038.63 P1.9@249.21,2087.4 179.21,2087.4 159.21,2067.4 159.21,177.38 199.21,137.38 400.98,137.38 526.9,263.3 973.98,263.3 990.36,246.92 1164.78,246.92 1315.3,397.43 1559.06,397.43 ; v1(1559.06,610.24) 1559.06,397.43 ; v1(1599.21,241.4) 1641.71,198.9 1853.43,198.9 1898.65,244.13 1928.91,244.13 1976.03,291.25 v1(1976.03,392.17) ; v1(1611.22,368.9) 1576.71,368.9 1569.21,376.4 1559.06,386.56 1559.06,397.43
PC4: P1.20 R49.1 U4.33 | length 2525.4
  Top w6.5: P1.20@349.21,1587.4 402.03,1587.4 425.64,1611.01 425.64,1711.38 471.21,1756.95 471.21,1820.9 629.27,1978.96 862.56,1978.96 889.97,2006.37 U4.33@972.97,2006.37 1029.48,2006.37 1106.96,1928.9 1275.21,1928.9 v1(1293.21,1946.9) ; R49.1@1455.13,822.07 1464.48,820.59 v1(1464.48,790.59)
  Bottom w6.5: v1(1293.21,1946.9) 1299.21,1940.9 1299.21,1515.75 1330.71,1484.25 1330.71,1399.4 1442.67,1287.44 1442.67,1131.36 1436.21,1124.9 1436.21,818.86 v1(1464.48,790.59)
PC5: P1.19 U4.34 | length 1047.5
  Top w6.5: P1.19@249.21,1587.4 298.38,1538.9 409.21,1538.9 441.38,1571.07 441.38,1703.51 486.21,1748.34 486.21,1817.9 631.53,1963.22 874.23,1963.22 897.7,1986.69 U4.34@972.97,1986.69
PC6: P2.47 U4.63 | length 2058.2
  Top w6.5: U4.63@1285.96,1594.96 1285.96,1538.24 1299.21,1524.99 1339.3,1524.99 v1(1341.21,1526.9)
  Bottom w6.5: v1(1341.21,1526.9) 1341.21,1562.9 1348.03,1569.72 1433,1569.72 1558.92,1443.8 1645.49,1443.8 1684.84,1404.45 1684.84,1349.36 1834.37,1199.83 1834.37,1076.9 1953.66,957.61 1953.66,860.18 2019.21,794.63 2019.21,511.31 2101.95,428.57 2101.95,310.52 2172.78,239.69 2172.78,198.61 2183.99,187.4 P2.47@2249.21,187.4
PC7: P2.48 U4.64 U7.37 | length 3315.5
  Top w6.5: v1(960.8,1010.95) 960.8,987.34 968.67,979.47 1000.15,979.47 1033.58,946.04 U7.37@1033.58,911.89 ; v1(1078.85,1656.29) 1133.94,1711.38 1305.65,1711.38 ; U4.64@1305.65,1594.96 1305.65,1711.38 ; v1(1348.21,1705.9) 1342.73,1711.38 1305.65,1711.38
  Bottom w6.5: v1(960.8,1010.95) 960.8,1194.9 1089.21,1323.31 1089.21,1618.54 1078.85,1628.9 v1(1078.85,1656.29) ; v1(1348.21,1705.9) 1382.08,1672.03 1409.39,1672.03 1433,1648.42 1433,1593.33 1566.79,1459.54 1653.36,1459.54 1700.58,1412.32 1700.58,1357.23 1850.11,1207.7 1850.11,1082.9 1970.88,962.13 1970.88,866.57 2034.21,803.24 2034.21,519.92 2117.69,436.44 2117.69,326.26 2204.26,239.69 2296.93,239.69 P2.48@2349.21,187.4
PC8: P2.45 U4.65 | length 1999.4
  Top w6.5: U4.65@1325.33,1594.96 1325.33,1648.42 1372.55,1695.64 v1(1401.52,1695.64)
  Bottom w6.5: v1(1401.52,1695.64) 1409.39,1695.64 1448.74,1656.29 1448.74,1601.2 1574.66,1475.28 1661.23,1475.28 1716.32,1420.19 1716.32,1365.1 1865.85,1215.57 1865.85,1094.9 1988.13,972.62 1988.13,872.93 2049.21,811.85 2049.21,528.53 2133.43,444.31 2133.43,342.49 2188.52,287.4 P2.45@2249.21,287.4
PC9: P2.46 U4.66 | length 2075.1
  Top w6.5: U4.66@1345.02,1594.96 1345.02,1640.55 1376.5,1672.03 1425.13,1672.03 1440.87,1687.77 v1(1440.87,1703.51)
  Bottom w6.5: v1(1440.87,1703.51) 1440.87,1687.77 1464.48,1664.16 1464.48,1609.07 1582.53,1491.02 1669.1,1491.02 1732.06,1428.06 1732.06,1372.97 1881.59,1223.44 1881.59,1100.9 2006.49,976 2006.49,878.18 2064.21,820.46 2064.21,540.92 2160.83,444.31 2160.83,381.35 2204.26,337.91 2298.7,337.91 P2.46@2349.21,287.4
PC10: P2.37 U4.78 U7.38 | length 2956
  Top w6.5: v1(921.45,1010.95) 921.45,995.21 952.93,963.73 992.28,963.73 1013.9,942.11 U7.38@1013.9,911.89 ; v1(1063.11,1734.99) 1063.11,1742.86 1078.85,1758.6 1227.83,1758.6 1244.12,1774.89 1495.13,1774.89 1558.92,1711.1 U4.78@1598.96,1711.1 1653.36,1711.1 1684.84,1679.62 v1(1684.84,1640.55)
  Bottom w6.5: v1(921.45,1010.95) 921.45,1178.9 1075.21,1332.66 1075.21,1610.56 1055.12,1630.65 1055.12,1726.99 v1(1063.11,1734.99) ; v1(1684.84,1640.55) 1716.32,1609.07 1771.41,1609.07 1873.72,1506.76 1873.72,1346.89 1959.85,1260.76 1959.85,1140.98 2083.3,1017.54 2083.3,918.98 2141.3,860.98 2141.3,700.31 2154.21,687.4 P2.37@2249.21,687.4
PC11: P2.38 U4.79 | length 1486.3
  Top w6.5: U4.79@1598.96,1730.78 1661.23,1730.78 1716.32,1675.69 v1(1716.32,1656.29)
  Bottom w6.5: v1(1716.32,1656.29) 1747.8,1624.81 1779.28,1624.81 1889.46,1514.63 1889.46,1353.65 1976.03,1267.08 1976.03,1144.08 2097.21,1022.9 2097.21,926.73 2157.04,866.9 2157.04,747.67 2169.21,735.5 2301.12,735.5 P2.38@2349.21,687.4
PC12: P2.35 U4.80 U7.39 | length 2912.1
  Top w6.5: v1(882.1,1010.95) 943.61,949.44 985.86,949.44 994.21,941.08 U7.39@994.21,911.89 ; v1(1047.24,1767.72) 1054.42,1774.9 1220.51,1774.9 1236.25,1790.64 1518.75,1790.64 1558.92,1750.47 U4.80@1598.96,1750.47 1669.36,1750.47 v1(1747.8,1672.03)
  Bottom w6.5: v1(882.1,1010.95) 882.1,1164.74 1061.21,1343.85 1061.21,1601.06 1039.37,1622.9 1039.37,1759.84 v1(1047.24,1767.72) ; v1(1747.8,1672.03) 1779.28,1640.55 1787.15,1640.55 1905.2,1522.5 1905.2,1360.41 1990.18,1275.43 1990.18,1147.93 2115.21,1022.9 2115.21,933.13 2172.78,875.56 2172.78,791.33 2176.71,787.4 P2.35@2249.21,787.4
PC13: P2.12 U4.7 | length 1175
  Top w6.5: v1(1401.52,2167.84) 1404.07,2170.39 U4.7@1404.07,2220.94
  Bottom w6.5: v1(1401.52,2167.84) 1401.52,2204.02 1458.4,2260.9 1981.54,2260.9 2010.98,2231.19 2204.26,2037.91 2298.7,2037.91 P2.12@2349.21,1987.4
PC14: P2.9 SB16.2 | length 986.5
  Bottom w6.5: SB16.2@1490.83,2496.9 1530.21,2496.9 1537.21,2489.9 1537.21,2454.68 1572.21,2419.68 1928.81,2419.68 2101.95,2246.54 2101.95,2181.84 2196.39,2087.4 P2.9@2249.21,2087.4
PC14-OSC32_IN: R22.1 SB16.1 U4.8 | length 354.3
  Top w6.5: U4.8@1384.39,2220.94 1384.39,2257.64 1439.21,2312.46 1439.21,2443.29 v1(1440.87,2443.29) 1440.87,2455.29 1446.21,2460.63 R22.1@1473.94,2460.63
  Bottom w6.5: v1(1440.87,2443.29) 1440.87,2496.9 SB16.1@1447.53,2496.9
PC15: P2.10 SB15.2 | length 1110.9
  Bottom w6.5: SB15.2@1490.83,2552.9 1495.16,2553.38 1495.64,2552.9 1531.73,2552.9 1552.73,2531.9 1552.73,2461.9 1579.21,2435.42 1936.68,2435.42 2117.69,2254.41 2117.69,2222.93 2204.26,2136.36 2300.26,2136.36 P2.10@2349.21,2087.4
PC15-OSC32_OUT: R21.1 SB15.1 U4.9 | length 511.3
  Top w6.5: U4.9@1364.7,2220.94 1364.7,2261.89 1415.96,2313.15 1415.96,2501.25 1446.21,2531.5 R21.1@1473.94,2531.5 1473.94,2561.34 1466.07,2569.21 1454.92,2569.21 1433,2591.13 v1(1433,2592.82)
  Bottom w6.5: v1(1433,2592.82) 1433,2552.9 SB15.1@1447.53,2552.9
PD0: P2.36 U4.81 | length 1404.6
  Top w6.5: U4.81@1598.96,1770.15 1669.1,1770.15 1722.1,1717.16 1742.02,1717.16 v1(1787.15,1672.03)
  Bottom w6.5: v1(1787.15,1672.03) 1845.81,1613.37 1845.81,1605.5 1920.94,1530.37 1920.94,1367.17 2007.51,1280.6 2007.51,1148.6 2133.21,1022.9 2133.21,940.34 2187.66,885.89 2187.66,849.41 2199.21,837.86 2298.75,837.86 P2.36@2349.21,787.4
PD1: P2.33 U4.82 | length 1259.2
  Top w6.5: U4.82@1598.96,1789.84 1669.1,1789.84 1724.07,1734.87 1763.66,1734.87 v1(1826.5,1672.03)
  Bottom w6.5: v1(1826.5,1672.03) 1861.71,1636.82 1861.71,1613.21 1936.68,1538.24 1936.68,1373.93 2023.25,1287.36 2023.25,1150.86 2148.9,1025.21 2148.9,948.26 2172.78,924.38 2212.24,924.38 P2.33@2249.21,887.4
PD2: P2.34 U4.83 | length 1372.5
  Top w6.5: U4.83@1598.96,1809.52 1669.1,1809.52 1722.11,1756.52 1771.41,1756.52 1832.29,1695.64 v1(1850.11,1695.64)
  Bottom w6.5: v1(1850.11,1695.64) 1877.13,1668.62 1877.13,1621.4 1952.42,1546.11 1952.42,1380.69 2038.99,1294.12 2038.99,1159.12 2163.21,1034.9 2163.21,972.29 2196.49,939.01 2297.6,939.01 P2.34@2349.21,887.4
PD3: P2.31 U4.84 | length 1243.9
  Top w6.5: U4.84@1598.96,1829.21 1669.1,1829.21 1724.08,1774.23 1779.28,1774.23 1826.39,1727.12 1865.85,1727.12 v1(1873.72,1719.25)
  Bottom w6.5: v1(1873.72,1719.25) 1897.05,1695.92 1897.05,1625.09 1968.16,1553.98 1968.16,1387.45 2054.76,1300.85 2054.76,1161.35 2178.63,1037.48 2178.63,996.23 2187.46,987.4 P2.31@2249.21,987.4
PD4: P2.32 R43.1 U4.85 U7.32 | length 3092.1
  Top w6.5: U7.32@1132.01,911.89 1132.01,932.25 1155.62,955.86 1201.71,955.86 1209.58,963.73 R43.1@1239.86,963.73 1239.21,963.08 1239.21,938.9 1245.21,932.9 1293.21,932.9 1299.21,938.9 1341.21,938.9 v1(1353.21,950.9) ; v1(1149.68,1797.95) 1220.51,1797.95 1236.25,1813.69 1535.31,1813.69 1543.18,1821.56 1543.18,1841.02 1551.05,1848.89 U4.85@1598.96,1848.89 1669.1,1848.89 1729.99,1788.01 1787.15,1788.01 1824.43,1750.73 v1(1873.72,1750.73)
  Bottom w6.5: v1(1149.68,1797.95) 1133.94,1782.21 1133.94,1467.41 1173.29,1428.06 1173.29,1357.23 1165.42,1349.36 1165.42,1238.9 1203.21,1201.11 1203.21,1148.9 1299.21,1052.9 1329.21,1052.9 1353.21,1028.9 v1(1353.21,950.9) ; v1(1873.72,1750.73) 1906.71,1750.73 1920.94,1736.5 1920.94,1624.81 1983.9,1561.85 1983.9,1394.21 2070.47,1307.64 2070.47,1169.64 2197.68,1042.43 2294.19,1042.43 P2.32@2349.21,987.4
PD5: P2.29 R50.1 U4.86 | length 1875.1
  Top w6.5: U4.86@1598.96,1868.58 1669.1,1868.58 1731.96,1805.72 1810.76,1805.72 1834.27,1782.21 v1(1834.37,1774.34) ; R50.1@1743.21,896.9 1773.21,926.9 2153.21,926.9 2188.21,961.9 2188.21,1073.4 2202.21,1087.4 P2.29@2249.21,1087.4
  Bottom w6.5: v1(1834.37,1774.34) 1906.71,1774.34 1936.68,1744.37 1936.68,1632.68 1999.64,1569.72 1999.64,1400.97 2086.21,1314.4 2086.21,1173.97 2172.78,1087.4 P2.29@2249.21,1087.4
PD6: P2.30 U4.87 | length 1327.2
  Top w6.5: U4.87@1598.96,1888.26 1669.1,1888.26 1735.81,1821.56 1834.37,1821.56 v1(1850.11,1805.82)
  Bottom w6.5: v1(1850.11,1805.82) 1865.85,1790.08 1922.42,1790.08 1952.42,1760.08 1952.42,1648.42 2015.38,1585.46 2015.38,1407.73 2101.95,1321.16 2101.95,1191.96 2157.04,1136.87 2299.75,1136.87 P2.30@2349.21,1087.4
PD7: P2.27 U4.88 | length 1180.5
  Top w6.5: U4.88@1598.96,1907.95 1669.1,1907.95 1739.75,1837.3 1857.98,1837.3 v1(1881.59,1813.69)
  Bottom w6.5: v1(1881.59,1813.69) 1923.16,1813.69 1968.16,1768.69 1968.16,1664.16 2031.12,1601.2 2031.12,1414.49 2117.69,1327.92 2117.69,1223.44 2153.73,1187.4 P2.27@2249.21,1187.4
PD8: P1.40 U4.55 | length 1477
  Top w6.5: v1(942.21,1439.9) 945.21,1442.9 1025.27,1442.9 1128.48,1546.11 U4.55@1128.48,1594.96
  Bottom w6.5: P1.40@349.21,587.4 411.21,587.4 472.96,649.15 472.96,1015.65 631.21,1173.9 715.21,1173.9 907.21,1365.9 907.21,1421.9 928.21,1442.9 942.21,1442.9 v1(942.21,1439.9)
PD9: P1.41 U4.56 | length 1639.9
  Top w6.5: v1(977.21,1418.9) 984.21,1411.9 1015.47,1411.9 1148.17,1544.59 U4.56@1148.17,1594.96
  Bottom w6.5: P1.41@249.21,487.4 297.21,535.4 387.21,535.4 486.96,635.15 486.96,1005.65 641.21,1159.9 727.21,1159.9 921.21,1353.9 921.21,1404.9 931.71,1415.4 972.64,1415.4 976.14,1418.9 v1(977.21,1418.9)
PD10: P1.42 U4.57 | length 1572.8
  Top w6.5: v1(949.21,1390.9) 1020.51,1390.9 1167.85,1538.24 U4.57@1167.85,1594.96
  Bottom w6.5: P1.42@349.21,487.4 403.21,487.4 438.21,522.4 438.21,550.15 501.96,613.9 501.96,999.65 648.21,1145.9 738.21,1145.9 949.21,1356.9 v1(949.21,1390.9)
PD11: P1.43 U4.58 | length 1920.8
  Top w6.5: P1.43@249.21,387.4 300.71,438.9 394.21,438.9 409.21,453.9 409.21,789.9 438.21,818.9 531.21,818.9 578.21,865.9 578.21,991.9 606.21,1019.9 747.21,1019.9 795.21,1067.9 960.21,1067.9 1001.72,1109.41 1063.36,1109.41 1078.85,1124.9 1078.85,1420.19 1187.54,1528.87 U4.58@1187.54,1594.96
PD12: P1.44 R40.2 U4.59 | length 1897.5
  Top w6.5: P1.44@349.21,387.4 408.93,387.4 424.21,402.69 424.21,781.9 445.21,802.9 536.21,802.9 592.21,858.9 592.21,977.9 620.21,1005.9 769.21,1005.9 816.21,1052.9 969.21,1052.9 1009.24,1092.93 1069.62,1092.93 1094.59,1117.9 1094.59,1343.9 ; R40.2@1127.55,1341.49 1125.14,1343.9 1094.59,1343.9 ; U4.59@1207.22,1594.96 1207.22,1522.5 1094.59,1409.87 1094.59,1343.9
PD13: P1.45 R36.2 U4.60 | length 2100.3
  Top w6.5: P1.45@249.21,287.4 295.94,334.13 399.21,334.13 439.6,374.51 439.6,769.28 459.21,788.9 543.21,788.9 606.21,851.9 606.21,966.34 627.21,987.34 v1(819.14,987.34) ; v1(1118.2,1396.58) 1118.2,1410.2 1196.9,1488.9 1226.91,1488.9 ; U4.60@1226.91,1594.96 1226.91,1488.9 ; R36.2@1284.95,1483.15 1283.47,1483.15 1282.12,1484.5 1277.8,1484.5 1273.41,1488.9 1226.91,1488.9
  Bottom w6.5: v1(819.14,987.34) 968.67,987.34 985.97,1004.64 985.97,1193.91 1118.2,1326.14 v1(1118.2,1396.58)